# Altium PCB BLM_2017.PcbDoc
Units mm, origin at the board's own origin, x right, y up, seen from the top; angles counter-clockwise.
Board outline 160 x 12 mm, 2 copper layers (Top Layer, Bottom Layer); 30 components, 27 nets, 79 pads, 8 vias.
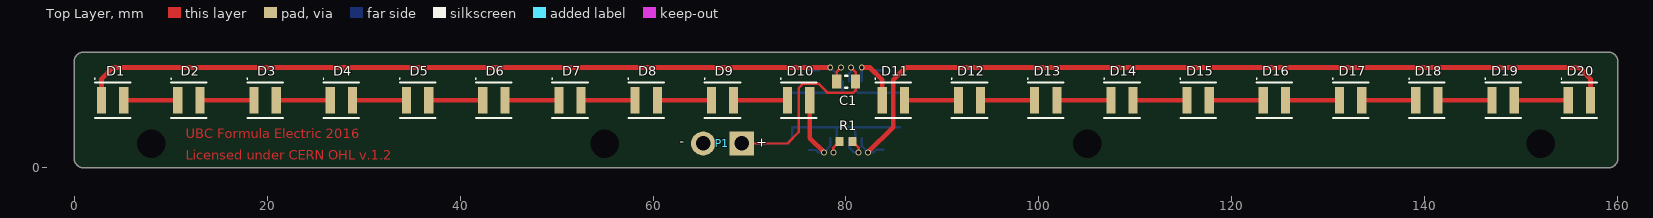
[diagram p0: Top Layer view]
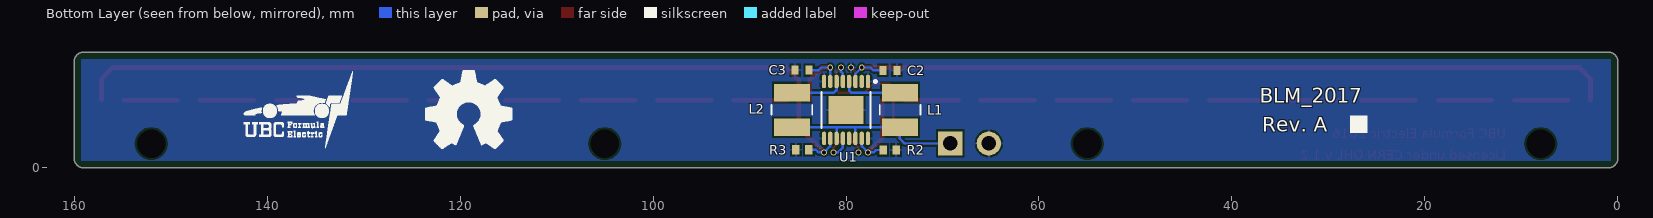
[diagram p1: Bottom Layer view, seen from below]

## Layer stack, top to bottom
Top Solder: solder mask 0.0102, Solder Resist, Dk 3.5
Top Layer: signal copper 0.0356
Dielectric 1: dielectric 0.32, FR-4, Dk 4.8
Bottom Layer: signal copper 0.0356
Bottom Solder: solder mask 0.0102, Solder Resist, Dk 3.5

## Board outline
1,0 cw(c1,1) 0,1 0,11 cw(c1,11) 1,12 159,12 cw(c159,11) 160,11 160,1 cw(c159,1) 159,0

## Design rules (kind name [scope] priority, off if disabled: settings)
Clearance [All] p1: gap=0.15 except(0.2: Poly-Poly SMDPad-Poly Track-Poly Via-Poly Arc-Poly Fill-Poly THPad-Poly)
ComponentClearance [All] p1: gap=0.25 collisioncheckmode=3 verticalgap=0.25 showdistances=FALSE
DiffPairsRouting [All] p1: maxlimit=10 minlimit=0.2 mostfreqgap=0.25 toplayer_minwidth=0.2 toplayer_maxwidth=10 toplayer_prefwidth=0.25 bottomlayer_minwidth=0.2 bottomlayer_maxwidth=10 bottomlayer_prefwidth=0.25 maxuncoupledlength=12.7
Height [All] p1: minheight=0 maxheight=100 prefheight=0
HoleSize [All] p1: absolutevalues=TRUE maxlimit=10 minlimit=0.3 maxpercent=80.000 minpercent=20.000
HoleToHoleClearance [All] p1: gap=0.25 allowstackedmicrovias=TRUE
MinimumSolderMaskSliver [All] p1: minsoldermaskwidth=0.1
PlaneClearance [All] p1: clearance=0.5
PlaneConnect [All] p1: planeconnectstyle=Relief reliefexpansion=0.25 reliefentries=4 reliefconductorwidth=0.25 reliefairgap=0.25
PolygonConnect [All] p1: connectstyle=Relief reliefconductorwidth=0.25 reliefentries=4 polygonreliefangle="90 Angle" airgapwidth=0.2
RoutingCorners [All] p1: cornerstyle=45-Degree minsetback=2.5 maxsetback=2.5
RoutingVias [All] p1: holewidth=0.4 width=0.6 viastyle="Through Hole" minholewidth=0.3 minwidth=0.5 maxholewidth=1 maxwidth=1.5
SilkToSilkClearance [All] p1: silktosilkclearance=0.25
SilkToSolderMaskClearance [IsPad] p1: minsilkscreentomaskgap=0.1 clearancetoexposedcopper=TRUE
SolderMaskExpansion [All] p1: expansion=0.1
UnpouredPolygon [All] p1: allowunpoured=FALSE
Width [All] p1: maxlimit=10 minlimit=0.2 preferedwidth=0.25 minimp=50.000000 maximp=50.000000 favimp=50.000000
18 further rules are at their usual default settings.

## Components (designator, comment, footprint, x,y, rotation, side; value= is the part's Value field where it differs from the comment)
C1 "Cap Semi" "TDK C-SERIES (2012)" 80.025,8.925 r0 top locked
C2 "Cap Semi" "TDK C-Series (1608)" 75.45,10.1 r180 bottom locked
C3 "Cap Semi" "TDK C-Series (1608)" 84.55,10.125 r180 bottom locked
D1 "Red" "OPTEK OVS5MxBCR4-Series (2-SMD)" 4,7 r0 top locked
D2 "Red" "OPTEK OVS5MxBCR4-Series (2-SMD)" 11.9,7 r0 top locked
D3 "Red" "OPTEK OVS5MxBCR4-Series (2-SMD)" 19.8,7 r0 top locked
D4 "Red" "OPTEK OVS5MxBCR4-Series (2-SMD)" 27.7,7 r0 top locked
D5 "Red" "OPTEK OVS5MxBCR4-Series (2-SMD)" 35.6,7 r0 top locked
D6 "Red" "OPTEK OVS5MxBCR4-Series (2-SMD)" 43.5,7 r0 top locked
D7 "Red" "OPTEK OVS5MxBCR4-Series (2-SMD)" 51.4,7 r0 top locked
D8 "Red" "OPTEK OVS5MxBCR4-Series (2-SMD)" 59.3,7 r0 top locked
D9 "Red" "OPTEK OVS5MxBCR4-Series (2-SMD)" 67.2,7 r0 top locked
D10 "Red" "OPTEK OVS5MxBCR4-Series (2-SMD)" 75.1,7 r0 top locked
D11 "Red" "OPTEK OVS5MxBCR4-Series (2-SMD)" 84.9,7 r0 top locked
D12 "Red" "OPTEK OVS5MxBCR4-Series (2-SMD)" 92.8,7 r0 top locked
D13 "Red" "OPTEK OVS5MxBCR4-Series (2-SMD)" 100.7,7 r0 top locked
D14 "Red" "OPTEK OVS5MxBCR4-Series (2-SMD)" 108.6,7 r0 top locked
D15 "Red" "OPTEK OVS5MxBCR4-Series (2-SMD)" 116.5,7 r0 top locked
D16 "Red" "OPTEK OVS5MxBCR4-Series (2-SMD)" 124.4,7 r0 top locked
D17 "Red" "OPTEK OVS5MxBCR4-Series (2-SMD)" 132.3,7 r0 top locked
D18 "Red" "OPTEK OVS5MxBCR4-Series (2-SMD)" 140.2,7 r0 top locked
D19 "Red" "OPTEK OVS5MxBCR4-Series (2-SMD)" 148.1,7 r0 top locked
D20 "Red" "OPTEK OVS5MxBCR4-Series (2-SMD)" 156,7 r0 top locked
L1 "Inductor" "Bourns SRN4018-Series" 74.4,6 r270 bottom locked
L2 "Inductor" "Bourns SRN4018-Series" 85.6,6 r270 bottom locked
P1 "2-Pin Bare Wire Pads" "2-Pin Bare Wire Pads" 67.2,2.525 r180 top locked
R1 "Res1" "PANASONIC ERJ-SERIES (1608)" 80,2.725 r0 top
R2 "Res1" "PANASONIC ERJ-SERIES (1608)" 75.475,1.85 r0 bottom locked
R3 "Res1" "PANASONIC ERJ-SERIES (1608)" 84.525,1.875 r180 bottom locked
U1 "LT3466" "LINEAR TECHNOLOGY LT3466 (8-TSSOP)" 80,6 r270 bottom locked

## Footprints (in the part's own frame and the unit in brackets; to place one, negate y for a bottom-side part, rotate by r counter-clockwise, add the part's x,y. Pads: shape width x height; smd on the part's side, far side on the other; paste and mask are expansions set on the pad)
"2-Pin Bare Wire Pads" [mm] "2-Pin Bare Wire Pads"
  rect 2.5x2.5 hole 1.5: 1(-2,0)
  round 2.5 hole 1.5: 2(2,0)
"Bourns SRN4018-Series" [mm] "Semi-Shielded Power Inductor"
  rect 1.8x3.7 smd: 1(-1.8,0) 2(1.8,0)
  silkscreen extent -0.5,-2.1 0.5,2.1, body extent -2.1,-2.1 2.1,2.1, height 1.8
"LINEAR TECHNOLOGY LT3466 (8-TSSOP)" [mm] "2-Channel Step-Up LED Driver"
  oval 1.4x0.45 smd: 1(-2.95,2.275) 2(-2.95,1.625) 3(-2.95,0.975) 4(-2.95,0.325) 5(-2.95,-0.325) 6(-2.95,-0.975) 7(-2.95,-1.625) 8(-2.95,-2.275) 9(2.95,-2.275) 10(2.95,-1.625) 11(2.95,-0.975) 12(2.95,-0.325) 13(2.95,0.325) 14(2.95,0.975) 15(2.95,1.625) 16(2.95,2.275)
  rect 2.94x3.58 smd: 17(0,0)
  silkscreen extent -3.07,-2.55 1.85,3.17, body extent -2.25,-2.55 2.25,2.55, height 1.1
"OPTEK OVS5MxBCR4-Series (2-SMD)" [mm] "0.5W Chip LED"
  rect 0.95x2.75 smd: 1(-1.15,0) 2(1.15,0)
  silkscreen extent -1.9,-1.85 1.85,2.3, body extent -1.85,-1.85 1.85,1.85, height 1.2
"PANASONIC ERJ-SERIES (1608)" [mm] "Thick Film Chip Resistor"
  rect 0.8x0.95 smd: 1(-0.675,0) 2(0.675,0)
  body extent -0.87,-0.48 0.87,0.48, height 0.55
"TDK C-Series (1608)" [mm] "Multilayer Ceramic Chip Capacitor"
  rect 0.75x0.95 smd: 1(-0.725,0) 2(0.725,0)
  body extent -0.85,-0.45 0.85,0.45, height 1.25
"TDK C-SERIES (2012)" [mm] "Multilayer Ceramic Chip Capacitor"
  rect 0.95x1.45 smd: 1(-0.975,0) 2(0.975,0)
  silkscreen extent -0.1,-0.63 0.1,0.63, body extent -1.1,-0.72 1.1,0.72, height 1.25

## Part data
C1 C2 C3: "Capacitor (Semiconductor SIM Model)"
D1 D2 D3 D4 D5 D6 D7 D8 D9 D10 D11 D12 D13 D14 D15 D16 D17 D18 D19 D20: library part LED0, "Typical INFRARED GaAs LED"
R1 R2 R3: "Resistor"
U1: library part "Linear Technology LT3466", "2-Channel Step-Up LED Driver"

## Free pads (board coordinates)
  round 0 hole 3: ""(8,2.5) ""(55,2.5) ""(105,2.5) ""(152,2.5)

## Via types
v1: diameter 0.6, hole 0.4, Top Layer to Bottom Layer, tented bottom, 7 vias
v2: diameter 0.6, hole 0.4, Top Layer to Bottom Layer, 1 vias

## Nets (pads, with @x,y where several pads share a name; then routed paths per layer and width w, separated by ;. In a path a pad name is that pad's centre, name@x,y a point inside that pad or via, vN(x,y) a via of type N, cw(c..) or ccw(c..) an arc to the next point about the centre after c; other vN are vias at no path point)
+12V: C1.2 L1.2 L2.2 P1.1 U1.5 U1.11 U1.14 | length 41.7
  Top Layer w0.25: P1.1 73.925,2.525 75.1,3.7 75.1,8.275 75.55,8.725 77.15,8.725 78.075,7.8 80.775,7.8 81,8.025 C1.2 81,9.925 v1(80.525,10.4)
  Bottom Layer w0.25: P1.1 73.925,2.525 74.425,3.025 74.425,4.2 79.025,4.2 ; U1.14 79.025,4.2 ; U1.5 80.325,9.775 80.525,9.975 v1(80.525,10.4) ; U1.11 80.975,4.2 ; L2.2 79.025,4.2
FB1: D10.2 R2.2 U1.15 | length 9.4
  Top Layer w0.5: D10.2 76.25,3.075 v1(77.725,1.6)
  Bottom Layer w0.25: R2.2 76.875,1.85 77.125,1.6 v1(77.725,1.6) 78.375,2.25 U1.15
FB2: D20.2 R3.2 U1.10 | length 87.5
  Top Layer w0.5: v2(82.275,1.6) 84.9,4.225 84.9,9.125 86.175,10.4 155.975,10.4 157.15,9.225 D20.2
  Bottom Layer w0.25: U1.10 81.625,2.25 v2(82.275,1.6) 82.85,1.6 83.125,1.875 R3.2
GND: C1.1 C2.2 C3.1 P1.2 R1.1 R2.1 R3.1 U1.1 U1.8 U1.9 U1.16 U1.17 | length 3
  Top Layer w0.25: v1(78.7,1.6) 78.7,2.1 R1.1 ; C1.1 79.05,9.975 v1(79.475,10.4)
NetD1_2: D1.2 D2.1 | length 5.6
  Top Layer w0.5: D1.2 D2.1
NetD2_2: D2.2 D3.1 | length 5.6
  Top Layer w0.5: D2.2 D3.1
NetD3_2: D3.2 D4.1 | length 5.6
  Top Layer w0.5: D3.2 D4.1
NetD4_2: D4.2 D5.1 | length 5.6
  Top Layer w0.5: D4.2 D5.1
NetD5_2: D5.2 D6.1 | length 5.6
  Top Layer w0.5: D5.2 D6.1
NetD6_2: D6.2 D7.1 | length 5.6
  Top Layer w0.5: D6.2 D7.1
NetD7_2: D7.2 D8.1 | length 5.6
  Top Layer w0.5: D7.2 D8.1
NetD8_2: D8.2 D9.1 | length 5.6
  Top Layer w0.5: D8.2 D9.1
NetD9_2: D9.2 D10.1 | length 5.6
  Top Layer w0.5: D9.2 D10.1
NetD11_2: D11.2 D12.1 | length 5.6
  Top Layer w0.5: D11.2 D12.1
NetD12_2: D12.2 D13.1 | length 5.6
  Top Layer w0.5: D12.2 D13.1
NetD13_2: D13.2 D14.1 | length 5.6
  Top Layer w0.5: D13.2 D14.1
NetD14_2: D14.2 D15.1 | length 5.6
  Top Layer w0.5: D14.2 D15.1
NetD15_2: D15.2 D16.1 | length 5.6
  Top Layer w0.5: D15.2 D16.1
NetD16_2: D16.2 D17.1 | length 5.6
  Top Layer w0.5: D16.2 D17.1
NetD17_2: D17.2 D18.1 | length 5.6
  Top Layer w0.5: D17.2 D18.1
NetD18_2: D18.2 D19.1 | length 5.6
  Top Layer w0.5: D18.2 D19.1
NetD19_2: D19.2 D20.1 | length 5.6
  Top Layer w0.5: D19.2 D20.1
NetR1_2: R1.2 U1.12 | length 3.5
  Top Layer w0.25: R1.2 81.3,2.1 v1(81.3,1.6)
  Bottom Layer w0.25: U1.12 80.325,2.1 80.825,1.6 v1(81.3,1.6)
SW1: L1.1 U1.4 | length 6.3
  Bottom Layer w0.25: L1.1 79.45,7.8 79.675,8.025 U1.4
SW2: L2.1 U1.6 | length 5.6
  Bottom Layer w0.25: U1.6 80.975,8.075 81.25,7.8 L2.1
VOUT1: C2.1 D1.1 U1.3 | length 82.3
  Top Layer w0.5: D1.1 2.85,9.225 4.025,10.4 v1(78.375,10.4)
  Bottom Layer w0.25: C2.1 77.175,10.1 77.475,10.4 v1(78.375,10.4) 79.025,9.75 U1.3
VOUT2: C3.2 D11.1 U1.7 | length 8.5
  Top Layer w0.5: v1(81.625,10.4) 82.475,10.4 83.75,9.125 D11.1
  Bottom Layer w0.25: U1.7 v1(81.625,10.4) 82.55,10.4 82.825,10.125 C3.2
pads on no net: U1.2 U1.13

## Polygon pours and split planes (outlines as drawn)
GND on Bottom Layer "GND Plane" (solid, remove dead copper, pour order 2): 0.75,0.75 0.75,11.25 159.25,11.25 159.25,0.75

## Keep-outs
Mechanical 1:
  lines w0.2: 0,1 ccw(c1,1) 1,0 ; 0,11 cw(c1,11) 1,12 ; 159,0 ccw(c159,1) 160,1 ; 159,12 cw(c159,11) 160,11

## Other copper
Top Layer:
  text "UBC Formula Electric 2016" at 11.6,3.05 h1
  text "Licensed under CERN OHL v.1.2" at 11.6,0.85 h1

## Silkscreen, mask and mechanical layers (free items; w line width, h text height)
Bottom Overlay:
  drawing of 3526 lines, arcs and shapes, not listed
  text "BLM_2017" at 37.125,6.75 h1.5
  text "Rev. A" at 36.875,3.75 h1.5
Mechanical 1:
  lines w0.2: 0,1 0,11 ; 1,0 159,0 ; 1,12 159,12 ; 160,1 160,11

## Text inside footprints (layer, text, board x,y; h text height)
P1: Top Overlay "+" at 71.825,3.025 h1 r180; Top Overlay "-" at 63.25,3.025 h1 r180